# Altium PCB ControleArduinoPCB.PcbDoc
Units mm, origin at the board's own origin, x right, y up, seen from the top; angles counter-clockwise.
Board outline 72.86 x 30.99 mm, 2 copper layers (Top Layer, Bottom Layer); 28 components, 30 nets, 124 pads, 15 vias.
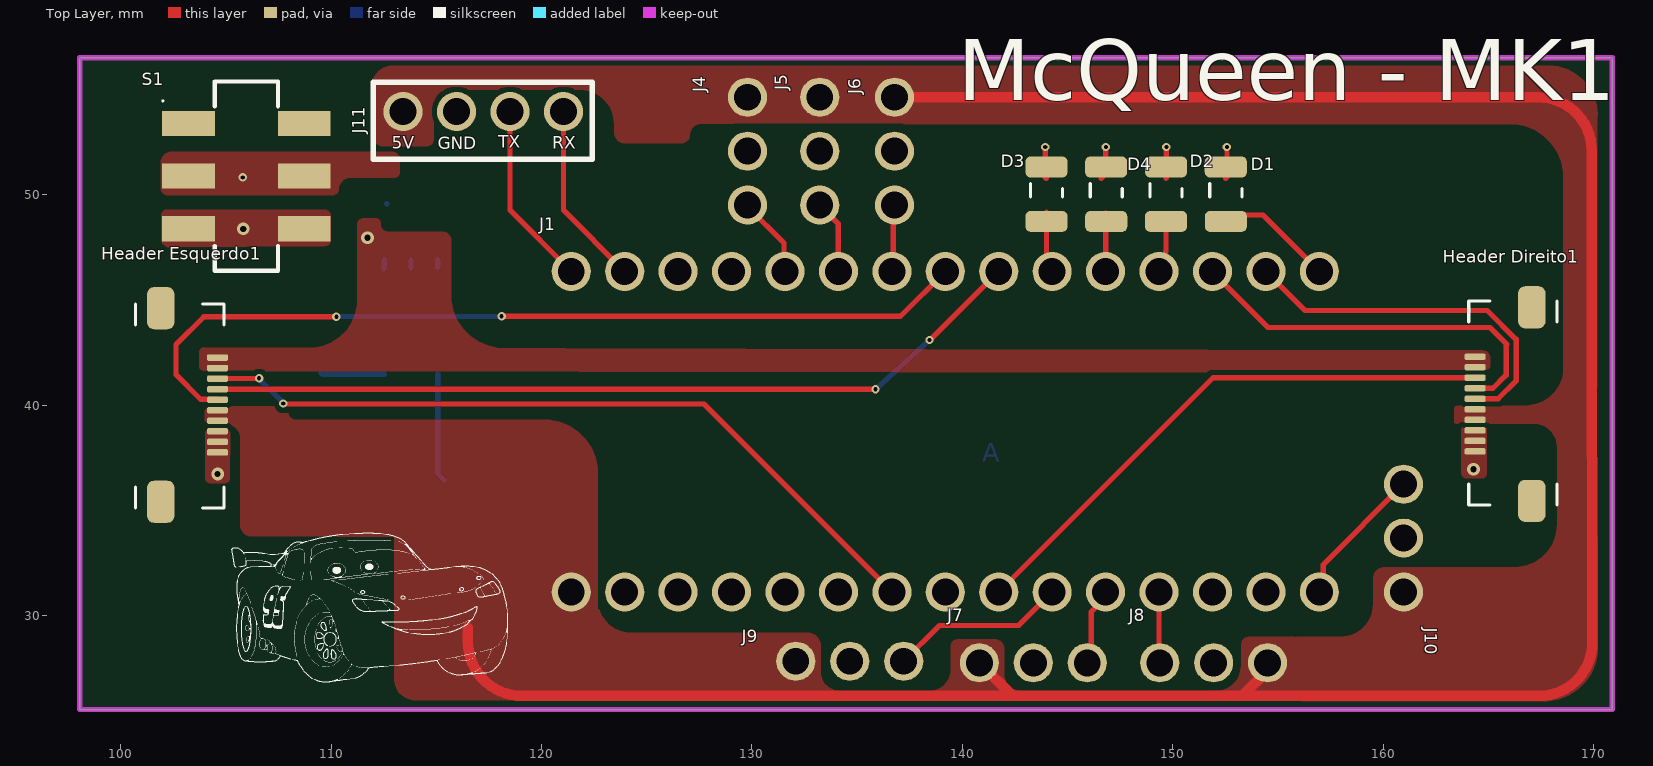
[diagram p0: Top Layer view]
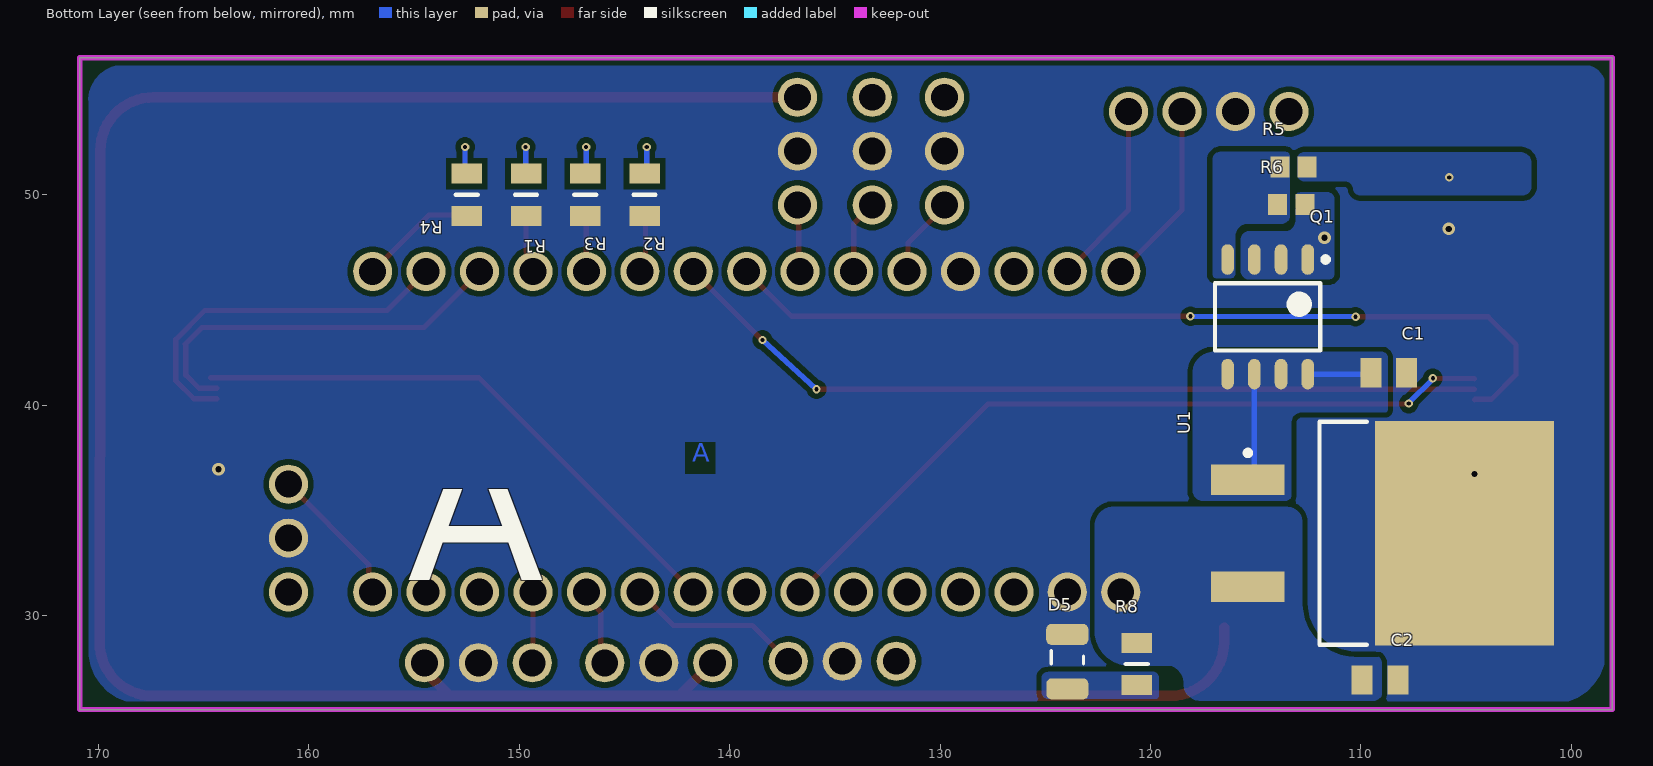
[diagram p1: Bottom Layer view, seen from below]

## Layer stack, top to bottom
Top Solder: solder mask 0.0102, Solder Resist, Dk 3.5
Top Layer: signal copper 0.0356
Dielectric 1: dielectric 0.32, FR-4, Dk 4.8
Bottom Layer: signal copper 0.0356
Bottom Solder: solder mask 0.0102, Solder Resist, Dk 3.5

## Board outline
98.044,25.527 170.9,25.527 170.9,56.515 98.044,56.515

## Design rules (kind name [scope] priority, off if disabled: settings)
Clearance [All] p1: gap=0.254 ignorepadtopadclearanceinfootprint=TRUE except(0: Arc-Hole Track-Hole SMDPad-Hole THPad-Hole Via-Hole Fill-Hole Poly-Hole Region-Hole Text-Hole; 0.1: Arc-Arc Arc-Track Arc-SMDPad Arc-Via Track-Track Track-SMDPad Track-Via SMDPad-SMDPad)
Height [All] p1: minheight=0 maxheight=100 prefheight=12.7
PlaneClearance [All] p1: clearance=0.1
PolygonConnect [All] p1: connectstyle=Direct reliefconductorwidth=0.254 reliefentries=4 polygonreliefangle="90 Angle" airgapwidth=0.254
RoutingVias [All] p1: holewidth=0.711 width=1.27 viastyle="Through Hole" minholewidth=0.711 minwidth=1.27 maxholewidth=0.711 maxwidth=1.27
SolderMaskExpansion [All] p1: expansion=0.102 istentingtop=FALSE
Width [All] p1: maxlimit=1 minlimit=0.254 preferedwidth=0.254 bottomlayer_maxwidth=0.254 minimp=50.000000 maximp=50.000000 favimp=50.000000
28 further rules are at their usual default settings.

## Classes and differential pairs
component class FontesLineares: 3 C1 C2 D5 Q1 R5 R6 R8 S1 U1
component class controleArduino: D1 D2 D3 D4 "Header Direito1" "Header Esquerdo1" J1 J3 J4 J5 J6 J7 J8 J9 J10 J11 R1 R2 R3 R4

## Components (designator, comment, footprint, x,y, rotation, side; value= is the part's Value field where it differs from the comment)
C1 "0.33 uF" C0805 108.673,41.521 r0 bottom
C2 "0.1uF" C0805 109.093,26.924 r0 bottom
D1 "Blue" DIODO_2-SMD-3215 152.527,50.033 r270 top
D2 "Blue" DIODO_2-SMD-3215 149.685,50.033 r270 top
D3 "Blue" DIODO_2-SMD-3215 144,50.033 r270 top
D4 "Blue" DIODO_2-SMD-3215 146.842,50.033 r270 top
D5 "Blue" DIODO_2-SMD-3215 123.952,27.813 r270 bottom
"Header Direito1" "505278-1033" FPC_CON 165.975,40.05 r90 top
"Header Esquerdo1" "505278-1033" FPC_CON 102.997,40.005 r270 top
J1 "ARDUINI NANO HEADER" "ARDUINO NANO" 121.422,31.115 r0 top
J4 "Female Header 3" "FEMALE HEADER 3" 129.794,54.635 r270 top
J5 "Female Header 3" "FEMALE HEADER 3" 133.223,54.635 r270 top
J6 "Female Header 3" "FEMALE HEADER 3" 136.779,54.635 r270 top
J7 "Female Header 3" "FEMALE HEADER 3" 140.81,27.75 r0 top
J8 "Female Header 3" "FEMALE HEADER 3" 154.515,27.75 r180 top
J9 "Female Header 3" "FEMALE HEADER 3" 137.215,27.825 r180 top
J10 "Female Header 3" "FEMALE HEADER 3" 160.975,31.11 r90 top
J11 "Bluetooth" BLUETOOTH 113.42,53.95 r0 top
Q1 "FDS6576" SOIC-8 114.427,44.196 r270 bottom
R1 "1.5 kR" RESISTOR_0805 149.683,50 r270 bottom
R2 "1.5 kR" RESISTOR_0805 144.05,50 r270 bottom
R3 "1.5 kR" RESISTOR_0805 146.867,50 r270 bottom
R4 "1.5 kR" RESISTOR_0805 152.5,50 r270 bottom
R5 "10kR" RESISTOR_0603 113.2,51.325 r0 bottom
R6 "10kR" RESISTOR_0603 113.3,49.525 r0 bottom
R8 "750R" RESISTOR_0805 120.65,27.686 r90 bottom
S1 "JS202011SCQN" DPDT 105.966,50.887 r270 top
U1 "L7805CD2T-TR" D2PAK 108.966,33.909 r180 bottom

## Footprints (in the part's own frame and the unit in brackets; to place one, negate y for a bottom-side part, rotate by r counter-clockwise, add the part's x,y. Pads: shape width x height; smd on the part's side, far side on the other; paste and mask are expansions set on the pad)
"ARDUINO NANO" [mm]
  round 1.86 hole 1.28: 3.3V(33.01,0) 5V(7.61,0) A0(27.93,0) A1(25.39,0) A2(22.85,0) A3(20.31,0) A4(17.77,0) A5(15.23,0) A6(12.69,0) A7(10.15,0) AREF(30.47,0) D0(2.53,15.24) D1(-0.01,15.24) D2(10.15,15.24) D3(12.69,15.24) D4(15.23,15.24) D5(17.77,15.24) D6(20.31,15.24) D7(22.85,15.24) D8(25.39,15.24) D9(27.93,15.24) D10(30.47,15.24) D11(33.01,15.24) D12(35.55,15.24) D13(35.55,0) GND(2.53,0) GND(7.61,15.24) RST(5.07,0) RST(5.07,15.24) Vin(-0.01,0)
  body extent -1.53,-1.25 37.07,16.49, height 5
BLUETOOTH [mm]
  round 1.86 hole 1.28: GND(2.54,0) RX(7.62,0) TX(5.08,0) VCC(0,0)
  silkscreen extent -1.42,-2.26 8.99,1.4, body extent -3.67,-1.26 11.33,5.67, height 46
C0805 [mm]
  rect 1x1.4 smd: 1(-0.85,-0.008) 2(0.85,-0.008)
  body extent -1.07,-0.68 1.07,0.67, height 0.9
D2PAK [mm] "D2-PAK, 3-Pads, Body 7,60x8,64mm (max), IPC Medium Density"
  rect 3.5x1.45 smd: 1(-6.4,2.54) 3(-6.4,-2.54)
  rect 8.5x10.65 smd: 2(3.9,0)
  silkscreen extent -6.53,-5.3 -0.75,5.3, body extent -7.41,-5.28 7.89,5.28, height 4.81
DIODO_2-SMD-3215 [mm]
  rrect50% 1x2 smd: A(1.3,0) C(-1.288,-0.001)
  silkscreen extent -0.51,-0.76 0.13,0.76, body extent -1.61,-0.77 1.66,0.87, height 0.9
DPDT [mm]
  rect 1.2x2.5 smd: A1(0,2.75) A1(0,-2.75) A2(-2.5,2.75) A2(-2.5,-2.75) A3(2.5,2.75) A3(2.5,-2.75)
  silkscreen extent -4.5,-4 4.5,1.5, body extent -4.5,-3.5 4.5,3.5, height 5.65
"FEMALE HEADER 3" [mm]
  round 1.86 hole 1.28: PIN1(0,0) PIN2(2.565,0) PIN3(5.13,0)
  body extent -1.52,-1.27 6.6,1.27, height 8.5
FPC_CON [mm] "Small Outline IC (SOIC), 1.27 mm pitch; 8 pin, 4.90 mm L X 3.90 mm W X 1.75 mm H body"
  rrect50% 0.3x1 smd: 1(-2.25,1.6) 2(-1.75,1.6) 3(-1.25,1.6) 4(-0.75,1.6) 5(-0.25,1.6) 6(0.25,1.6) 7(0.75,1.6) 8(1.25,1.6) 9(1.75,1.6) 10(2.25,1.6)
  rrect50% 2x1.3 smd: MP1(-4.6,-1.1) MP2(4.6,-1.1)
  silkscreen extent -4.8,-2.3 4.9,1.9, body extent -5.25,-3.5 5.25,1.8, height 1.88
RESISTOR_0603 [mm]
  rect 0.9x1 smd: 1(-0.65,0) 2(0.65,0)
  body extent -0.8,-0.4 0.8,0.4, height 0.55
RESISTOR_0805 [mm]
  rect 0.95x1.45 smd: 1(-1,0) 2(1,0)
  silkscreen extent 0,-0.53 0,0.53, body extent -1.02,-0.63 1.02,0.63, height 0.5
SOIC-8 [mm] "SOIC, 8-Leads, Body 4,90x3,90mm, Pitch 1,27mm, IPC Medium Density"
  oval 1.45x0.6 smd: D(2.725,-1.905) D(2.725,-0.635) D(2.725,0.635) D(2.725,1.905) G(-2.725,-1.905) S(-2.725,-0.635) S(-2.725,0.635) S(-2.725,1.905)
  silkscreen extent -2.85,-2.5 1.6,2.88, body extent -2,-2.5 2,2.5, height 1.75

## Part data
C1: library part GCM21BR71E334KA37K, "CAP CER 0.33UF 25V X7R 0805", Manufacturer="Murata Eletronics", Operating Temperature="-55 C ~ 125 C", Package / Case="0805 (2012 Metric)", Supplier Part Number 1=81-GCM21BR71E334KA7K, Tolerance=10%, Voltage - Rated="25 VDC", Category="Ceramic Capacitor", ComponentLink1Description=Datasheet, ComponentLink1URL=https://br.mouser.com/datasheet/2/281/GCM21BR71E334KA37_01-1968656.pdf, ComponentLink2Description="Mouser Link", ComponentLink2URL=https://br.mouser.com/ProductDetail/Murata-Electronics/GCM21BR71E334KA37K?qs=N3Kl9KD794Tg%2FXM5q2uFQQ%3D%3D, ComponentLink3Description=ESR, ComponentLink3URL=https://www.murata.com/en-us/products/productdetail?partno=GCM21BR71E334KA37%23, Dieletric=X7R, Library Control - Checked Footprint=Yes, Library Control - Checked Schematic=Yes, Library Control - Last Update="28/06/2021 00:57", Library Control - Person that Checked Footprint=Nikaum, Library Control - Person that Checked Schematic=Nikaum, Library Control - Person that did the Last Update Footprint=Nikaum, Library Control - Person that did the Last Update Schematic=Nikaum, Library Ref=Capacitor, Part Number=GCM21BR71E334KA37K, Price="1= 0,57, 10= 0,398, 100= 0,239 (USD)", Size / Dimension="2,00 L x 1,25 W x 1,25 H", Supplier 1=Mouser
C2: library part C0805C104M3RACTU, "CAP CER 0.1uF 25V X7R 0805", Manufacturer=Kemet, Operating Temperature="-55 C ~ 125 C", Package / Case="0805(2012 mestric)", Supplier Part Number 1=80-C0805C104M3R, Tolerance=20%, Voltage - Rated="25 VDC", Category="Ceramic Capacitor", ComponentLink1Description=Datasheet, ComponentLink1URL=https://br.mouser.com/datasheet/2/212/KEM_C1002_X7R_SMD-1102033.pdf, ComponentLink2Description="Mouser Link", ComponentLink2URL=https://br.mouser.com/ProductDetail/KEMET/C0805C104M3RACTU?qs=jbCUrP3sAgSIdMuvv9W4Pg%3D%3D, Dieletric=X7R, ESR=-, Library Control - Checked Footprint=No, Library Control - Checked Schematic=Yes, Library Control - Last Update="26/06/2021 20:52", Library Control - Person that Checked Schematic=Guilherme, Library Control - Person that did the Last Update Schematic=Marcos, Library Ref=Capacitor, Part Number=C0805C104M3RACTU, Price="1=0,13 10=0,064 100=0,037 1000=0,025 (USD)", Size / Dimension="1.25 mm W x 2 mm L x 0.78 mm H", Supplier 1=Mouser
D1 D2 D3 D4 D5: library part EAST3215BA5, "LED 75mW BLUE 45MCD 3215", Current - Forward (If)="20 mA", Manufacturer="Everlight Electronics", Max Power Dissipation="75 mW", Operating Temperature="- 40 °C ~ 85 °C", Package / Case=3215, Reverse Voltage="5 V", Supplier Part Number 1=638-EAST3215BA5, Voltage - Forward (Vf)="3,30 V", Category="Standard LEDs - SMD", Color=Blue, ComponentLink1Description="Mouser Link", ComponentLink1URL=https://www.mouser.com/ProductDetail/Everlight/EAST3215BA5?qs=Cqqh%252BS766wnzp9nQVj5A4g==, ComponentLink2Description=Datasheet, ComponentLink2URL=https://www.mouser.com/datasheet/2/143/EAST3215BA5-1154292.pdf, Library Control - Checked Footprint=yes, Library Control - Checked Schematic=yes, Library Control - Last Update="13/06/2021 12:45", Library Control - Person that Checked Footprint=Lucas, Library Control - Person that Checked Schematic=Lucas, Library Control - Person that did the Last Update Footprint="Stéfany (Ster)", Library Control - Person that did the Last Update Schematic="Stéfany (Ster)", Library Ref=Diodo/Led, Luminous Intensity="45 mcd", Max Current Rating="20 mA", Part Number=EAST3215BA5, Price="1 = 0,3800, 10 = 0,2050, 100 = 0.1080 (USD)", Supplier 1=Mouser, Viewing Angle=130°, Wavelength="468 nm"
"Header Direito1" "Header Esquerdo1": library part 505278-1033_BODY, "CONN FFC/FPC HORZ 10POS 0.50MM", Current Rating (Amps)=500mA, Manufacturer=Molex, Operating Temperature="-40°C ~ 85°C", Supplier Part Number 1=538-505278-1033, Category=Connectors, ComponentLink1Description=Datasheet, ComponentLink1URL=https://br.mouser.com/datasheet/2/276/2/5052781033_FFC_FPC_CONNECTORS-772019.pdf, ComponentLink2Description="Mouser Link", ComponentLink2URL=https://br.mouser.com/ProductDetail/Molex/505278-1033?qs=c8NFF48pVsDStgrQCBOSTg%3D%3D, Contact Length - Mating=0.50mm, Contact Material=Tin, Contact Type=FFC/FPC, Insulation Material="Liquid Crystal Polymer", Library Control - Checked Footprint=Yes, Library Control - Checked Schematic=Yes, Library Control - Last Project that Used=Follow-Final, Library Control - Last Update="24/04/2021 00:25", Library Control - Person that Checked Footprint=Lucas, Library Control - Person that Checked Schematic=Lucas, Library Control - Person that did the Last Update Footprint=Mateus(Dimas), Library Control - Person that did the Last Update Schematic=Mateus(Dimas), Library Ref=Connectors, Mounting Type="Right Angle", Number of Positions=10, Number of Rows=1, Part Number=505278-1033, Pitch=0.50mm, Price="1=0,51000, 10=0,42900, 100=0,33400 (USD)", Supplier 1=Mouser, Termination=SMD
J1: library part "Header Arduino Nano"
J11: library part "Barramento Bluetooth", "BARRAMENTO BLUETOOTH HC-06", Frequency="2,4 GHz", Operating Voltage="3,6 / 6 (V)", Recomended Operating Configuration="5V @ 50mA", Bluetooth Mode="Slave Only", Library Ref=Header, Max Range=10m, Maximum Serial Transmission Rate="9600 bps", Modulation="GFSK (Gaussian Frequency Shift Keying)", Number of Contacts=4
Q1: "MOSFET P-CH 20V 11A SOIC-8", Current - Continuous Drain (Id) @25°C=-11A, Drain to Source Voltage (Vds)=-20V, Drive Voltage (Max Rds On, Min Rds On)="-2.5V ~4.5V", Input Capacitance (Ciss) (Max) @Vds=4044pF@-10V, Manufacturer="onsemi / Fairchild", Operating Temperature="-55 °C ~150 °C", Package / Case=SOIC-8, Power Dissipation (Max)=2.5W, Supplier Part Number 1=512-FDS6576, ComponentLink1Description=Datasheet, ComponentLink1URL=https://br.mouser.com/datasheet/2/308/1/FDS6576_D-1808687.pdf, ComponentLink2Description=Mouser, ComponentLink2URL=https://br.mouser.com/ProductDetail/onsemi-Fairchild/FDS6576?qs=FOlmdCx%252BAA1N14vq5QZP7Q%3D%3D, FET Type=P-Channel, Gate Charge (Qg) (Max) @ Vgs=60nC@-4.5V, Library Ref=Mosfet, Part Number=SOIC-8, Price="1=1.34, 10=1.20, 100=0.932, 500=0.77, 1000=0.608 (USD)", Rds On (Max) @ Id, Vgs="23mOhms @ -11A, -4.5V", Rise / Fall Time (Typ)="17 / 79 (ns)", Supplier 1=Mouser, Vgs (Max)=12V, Vgs(th) (Max) Id=-1.5V@-250uA
R1 R2 R3 R4: library part CRCW08051K50FKEAC, "RES SMD 1.5K OHM 1% 1/8W 0805", Manufacturer="Vishay / Dale", Operating Temperature="-55 C ~ 155 C", Package / Case="0805 (2012 Metric)", Power Rating="125 mW (1/8 W)", Resistor Type=Fixo, Supplier Part Number 1=71-CRCW08051K50FKEAC, Temperature Coefficient="100 PPM / C", Tolerance="1 %", Voltage Rating="150 V", Category="Thick Film Resistors - SMD", ComponentLink1Description="Mouser Link", ComponentLink1URL=https://br.mouser.com/ProductDetail/Vishay-Dale/CRCW08051K50FKEAC?qs=E3Y5ESvWgWMwo6R2oqPQ9Q%3D%3D, ComponentLink2Description=Datasheet, ComponentLink2URL=https://br.mouser.com/datasheet/2/427/crcwce3-1762584.pdf, Library Control - Checked Footprint=Yes, Library Control - Checked Schematic=Yes, Library Control - Last Update="27/06/2021 20:45", Library Control - Person that Checked Footprint=Nikaum, Library Control - Person that Checked Schematic=Nikaum, Library Control - Person that did the Last Update Footprint=Nicolas, Library Control - Person that did the Last Update Schematic=Nikaum, Library Ref=Resistor, Part Number=CRCW08051K50FKEAC, Price="1=0,10, 10=0,059, 100=0,024 (USD)", Size / Dimension="2,00 L x 1,25 W x 0,45 H", Supplier 1=Mouser
R5 R6: library part RC0603JR-0710KL, "RES SMD 10K OHM 5% 1/10W 0603", Manufacturer=Yageo, Operating Temperature="- 55ºC ~ 155ºC", Package / Case="0603 (1608 Metric)", Power Rating="100 mW (1/10 W)", Resistor Type=Fixo, Supplier Part Number 1=603-RC0603JR-0710KL, Temperature Coefficient="100 PPM / C", Tolerance="5 %", Voltage Rating="75 V", Category="Thick Film Resistors - SMD", ComponentLink1Description="Mouser Link", ComponentLink1URL=https://br.mouser.com/ProductDetail/Yageo/RC0603JR-0710KL?qs=ksOUTF%2FWcd8D6T22BJkQ7g%3D%3D, ComponentLink2Description="Datsheet Link", ComponentLink2URL=https://br.mouser.com/datasheet/2/447/Yageo_03_18_2021_PYu_RC_Group_51_RoHS_L_11-2199992.pdf, Library Control - Checked Footprint=No, Library Control - Checked Schematic=Yes, Library Control - Last Update="21/06/21 14:15", Library Control - Person that Checked Schematic=Marcos, Library Control - Person that did the Last Update Footprint=Dalarme, Library Control - Person that did the Last Update Schematic=Marcos, Library Ref=Resistor, Part Number=RC0603JR-0710KL, Price="1=0,10, 10=0,015, 100=0,005 1000=0,0040 (USD)", Size / Dimension="1.6 mm L x  0.8 mm W x  0.45 mm H", Supplier 1=Mouser
R8: library part ERJ-6GEYJ751V, "RES SMD 750 OHM 5% 1/8W 0805", Manufacturer=Panasonic, Operating Temperature="- 55ºC ~ 155ºC", Package / Case="0805 (2012 Metric)", Power Rating="125 mW (1/8 W)", Resistor Type=Fixed, Supplier Part Number 1=667-ERJ-6GEYJ751V, Temperature Coefficient="200 PPM / C", Tolerance="5 %", Voltage Rating="150 V", Category="Thick Film Resistors - SMD", ComponentLink1Description="Mouser Link", ComponentLink1URL=https://br.mouser.com/ProductDetail/Panasonic/ERJ-6GEYJ751V?qs=sGAEpiMZZMukHu%252BjC5l7YYjpZ9X9PhOCxoCk8Svj5Vk%3D, ComponentLink2Description=Datasheet, ComponentLink2URL=https://br.mouser.com/datasheet/2/315/AOA0000C301-1488782.pdf, Library Control - Checked Footprint=Yes, Library Control - Checked Schematic=Yes, Library Control - Last Update="27/06/2021 20:29", Library Control - Person that Checked Footprint=Nikaum, Library Control - Person that Checked Schematic=Guilherme, Library Control - Person that did the Last Update Footprint=Dalarme, Library Control - Person that did the Last Update Schematic=Nikaum, Library Ref=Resistor, Part Number=ERJ-6GEYJ751V, Price="1=0,10, 10=0,055, 100=0,021 (USD)", Size / Dimension="2 mm L x  1.25 mm W x  0.6 mm H", Supplier 1=Mouser
S1: "DEEP SWITCH 4 POSITIONS", Current Rating="300 mA", Manufacturer=C&K, Mouser Part Number=611-JS202011SCQN, Operating Temperature(max - min)=-20~70°C, Voltage Rating DC="30 VDC", ComponentLink1Description="Mouser Link", ComponentLink1URL=https://br.mouser.com/ProductDetail/CK/JS202011SCQN?qs=LgMIjt8LuD95JYWxZ7NvZA%3D%3D, ComponentLink2Description="Datasheet Link", ComponentLink2URL=https://www.mouser.com/datasheet/2/60/js-1841892.pdf, Library Control - Checked Footprint=Yes, Library Control - Checked Schematic=Yes, Library Control - Last Update=15/06/2021, Library Control - Person that Checked Footprint=Nikaum, Library Control - Person that Checked Schematic=Nikaum, Library Control - Person that did the Last Update Footprint=Nikaum, Library Control - Person that did the Last Update Schematic=Nikaum, Library Ref=Diversos, Part Number=JS202011SCQN, Supplier=Mouser, Switch Function="ON - ON"
U1: "IC REG LINEAR 5V 1A D2PAK", Current - Output=1A, Current - Quiescent (Iq)=8mA, Manufacturer=ST, Max Power Dissipation="Internally Limited", Operating Temperature="-40~125 ºC", Package/ Case=D2PAK, Supplier Part Number 1=511-L7805CD2T-TR, Voltage - Dropout (Max)=2V, Voltage - Input (Max)=35V, Voltage - Output (Max)=5.25V, Voltage - Output (Min/Fixed)=5V, Category="Linear Voltage Regulator", ComponentLink1Description="Mouser Link", ComponentLink1URL=https://br.mouser.com/ProductDetail/STMicroelectronics/L7805CD2T-TR?qs=%2Fha2pyFadujE9KQ1BxQHaLKqcK8XYkwQA8UfL%2FIGb8dfQq%2Fq%2FT%2Fjqg%3D%3D, ComponentLink2Description=Datasheet, ComponentLink2URL=https://br.mouser.com/datasheet/2/389/cd00000444-1795274.pdf, Library Control - Checked Footprint=Yes, Library Control - Checked Schematic=Yes, Library Control - Last Update=25/06/21, Library Control - Person that Checked Footprint=Nícolas, Library Control - Person that Checked Schematic=Nícolas, Library Control - Person that did the Last Update Schematic=Nícolas, Library Ref="Voltage Regulator", Number of Regulators=1, Output Type=Fixed, Part Number=L7805CD2T-TR, Power Dissipation="Internally Limited", Price="1=0,93, 10=0,83, 100=0,79 (USD)", Supplier 1=Mouser
J4 J5 J6 J7 J8 J9 J10: Library Ref=Header, Number of Contacts=3, System=Connector

## Via types
v1: diameter 0.4, hole 0.2, Top Layer to Bottom Layer, tented top, 11 vias
v2: diameter 0.6, hole 0.3, Top Layer to Bottom Layer, tented top, 4 vias

## Nets (pads, with @x,y where several pads share a name; then routed paths per layer and width w, separated by ;. In a path a pad name is that pad's centre, name@x,y a point inside that pad or via, vN(x,y) a via of type N, cw(c..) or ccw(c..) an arc to the next point about the centre after c; other vN are vias at no path point)
5V: "Header Direito1.4" "Header Direito1.5" "Header Esquerdo1.6" "Header Esquerdo1.7" C2.2 J1.Vin J4.PIN1 J5.PIN1 J6.PIN1 J7.PIN1 J8.PIN1 J9.PIN3 J10.PIN1 J11.VCC R8.2 U1.3 | length 119.3
  Top Layer w0.5: 116.5,29.421 116.5,28.75 ccw(c119.075,28.75) 119.075,26.175 142.385,26.175 ; J6.PIN1 167.379,54.635 cw(c167.379,52.095) 169.919,52.095 169.919,37.62 cw(c167.375,37.225) 169.95,37.225 169.95,28.715 cw(c167.41,28.715) 167.41,26.175 153.308,26.175 ; J7.PIN1 142.385,26.175 ; J8.PIN1 154.515,27.382 153.308,26.175 ; 142.385,26.175 153.308,26.175
BAT: "Header Direito1.9" "Header Direito1.10" "Header Esquerdo1.1" "Header Esquerdo1.2" Q1.S R6.1 | length 1.2
  Bottom Layer w0.254: Q1.S@112.522,46.489 Q1.S@112.522,46.921 ; R6.1@112.632,49.582 R6.1@112.647,49.567 ; Q1.S@113.792,46.496 Q1.S@113.792,46.921 ; Q1.S@115.062,46.553 Q1.S@115.062,46.921
  other v2: 111.725,47.95
BLUETOOTHRX: J1.D0 J11.RX | length 8.8
  Top Layer w0.254: J11.RX 121.04,49.267 J1.D0
BLUETOOTHTX: J1.D1 J11.TX | length 8.8
  Top Layer w0.254: J11.TX 118.5,49.267 J1.D1
DIST1: J1.D2 J4.PIN3 | length 4.5
  Top Layer w0.254: J4.PIN3 129.794,49.429 131.525,47.698 J1.D2@131.525,45.717
DIST2: J1.D3 J5.PIN3 | length 3.5
  Top Layer w0.254: J5.PIN3 134.1,48.628 J1.D3@134.1,46.395
DIST3: J1.D4 J6.PIN3 | length 3.2
  Top Layer w0.254: J1.D4 136.715,46.419 136.715,49.442 J6.PIN3
DIST4: J1.A1 J7.PIN3 | length 3.7
  Top Layer w0.254: J7.PIN3 146.127,27.937 146.127,30.163 146.812,30.848 J1.A1
DIST5: J1.A0 J8.PIN3 | length 4.2
  Top Layer w0.254: J8.PIN3@149.095,27.562 149.352,27.305 J1.A0
FLAGSIGNAL: J1.A2 J9.PIN1 | length 8.4
  Top Layer w0.254: J9.PIN1 138.915,29.525 142.682,29.525 J1.A2
GND: "Header Direito1.1" "Header Direito1.2" "Header Direito1.3" "Header Esquerdo1.8" "Header Esquerdo1.9" "Header Esquerdo1.10" C1.1 C2.1 D5.C J1.GND J4.PIN2 J5.PIN2 J6.PIN2 J7.PIN2 J8.PIN2 J9.PIN2 J10.PIN2 J11.GND R1.2 R2.2 R3.2 R4.2 S1.A3 U1.2
  other v2: 104.6,36.725 164.3,36.95 105.825,48.375
LED1: D1.A J1.D12 | length 5.6
  Top Layer w0.254: D1.A@152.527,49.035 154.292,49.035 J1.D12
LED2: D2.A J1.D9 | length 2.8
  Top Layer w0.254: J1.D9 149.659,46.662 149.659,47.281 149.685,47.307 D2.A@149.685,49.03
LED3: D3.A J1.D7 | length 2.9
  Top Layer w0.254: D3.A@144,49.172 144,46.627 J1.D7
LED4: D4.A J1.D8 | length 2.8
  Top Layer w0.254: J1.D8 146.812,48.147 D4.A@146.812,49.134
M1Aux: "Header Direito1.8" J1.A3 | length 27.2
  Top Layer w0.254: J1.A3 151.917,41.3 164.674,41.3
M1DIR: "Header Esquerdo1.5" J1.D5 | length 41.9
  Top Layer w0.254: 104.597,40.255 104.574,40.278 103.797,40.278 102.625,41.45 102.625,42.875 103.95,44.2 v1(110.25,44.2) ; v1(118.1,44.225) 137.062,44.225 J1.D5
  Bottom Layer w0.254: v1(110.25,44.2) 110.262,44.212 118.088,44.212 v1(118.1,44.225)
M1PWM: "Header Esquerdo1.4" J1.D6 | length 39.4
  Top Layer w0.254: 104.597,40.755 104.599,40.753 135.872,40.753 v1(135.875,40.75) ; v1(138.443,43.094) 138.457,43.094 141.718,46.355 J1.D6
  Bottom Layer w0.254: v1(135.875,40.75) 135.906,40.778 v1(138.443,43.094)
M2Aux: "Header Esquerdo1.3" J1.A5 | length 36.3
  Top Layer w0.254: 104.597,41.255 104.607,41.265 106.565,41.265 v1(106.575,41.275) ; v1(107.725,40.075) 107.75,40.05 127.717,40.05 J1.A5
  Bottom Layer w0.254: v1(106.575,41.275) 106.575,41.25 107.725,40.1 v1(107.725,40.075)
M2DIR: "Header Direito1.6" J1.D11 | length 18.4
  Top Layer w0.254: J1.D11@153.924,45.847 154.493,45.847 J1.D11@154.727,45.613 ; J1.D11 156.29,44.497 164.953,44.497 166.325,43.125 166.325,41.15 165.475,40.3 164.375,40.3
M2PWM: "Header Direito1.7" J1.D10 | length 18.7
  Top Layer w0.254: J1.D10 151.892,46.324 154.528,43.688 165.087,43.688 165.875,42.9 165.85,42.875 165.85,41.425 165.225,40.8 164.375,40.8
NetC1_2: C1.2 Q1.D U1.1 | length 8.2
  Bottom Layer w0.254: C1.2 109.581,41.471 Q1.D@112.522,41.471 ; Q1.D@115.062,41.471 115.062,36.753 U1.1
NetD1_C: D1.C R4.1 | length 2.8
  Top Layer w0.254: 152.527,50.783 152.581,50.837 v1@152.581,52.259
  Bottom Layer w0.254: R4.1 ccw(c152.5,51.081) 152.581,51.081 v1(152.581,52.27)
NetD2_C: D2.C R1.1 | length 2.8
  Top Layer w0.254: 149.685,50.783 149.703,50.801 v1(149.703,52.27)
  Bottom Layer w0.254: R1.1 149.703,51.02 v1(149.703,52.27)
NetD3_C: D3.C R2.1 | length 2.8
  Top Layer w0.254: v1(143.948,52.27) 143.948,50.835 ccw(c144,50.835) 144,50.783
  Bottom Layer w0.254: v1(143.948,52.27) 143.948,51.102 R2.1
NetD4_C: D4.C R3.1 | length 2.8
  Top Layer w0.254: 146.6,50.775 146.825,51 v1@146.825,52.225
  Bottom Layer w0.254: v1(146.826,52.27) 146.826,51.041 R3.1
NetD5_A: D5.A R8.1
NetQ1_G: Q1.G R5.2 R6.2
NetR5_1: R5.1 S1.A1
  other v1: 105.8,50.825
START: J1.D13 J10.PIN3 | length 6.8
  Top Layer w0.254: J1.D13 157.161,31.304 157.161,32.426 J10.PIN3
pads on no net: "Header Direito1.MP1" "Header Direito1.MP2" "Header Esquerdo1.MP1" "Header Esquerdo1.MP2" J1.3.3V J1.5V J1.A4 J1.A6 J1.A7 J1.AREF J1.RST S1.A2

## Polygon pours and split planes (outlines as drawn)
5V on Top Layer "5V_L01_P075" (solid, pour order 75): 106.16,39.95 107.675,39.95 cw(c107.675,39.675) 107.95,39.675 ccw(c108.325,39.675) 108.325,39.3 108.825,39.3 cw(c108.1,39.3) 108.1,38.575 106.525,38.575 cw(c106.525,39.225) 105.875,39.225
BAT on Top Layer "BAT_L01_P030" (solid, pour order 30): 103.975,42.75 ccw(c103.975,42.5) 103.725,42.5 103.725,41.825 ccw(c103.95,41.85) 103.975,41.625 164.722,41.525 ccw(c164.747,41.865) 165.087,41.841 165.087,42.262 ccw(c164.75,42.263) 164.75,42.6
5V on Top Layer "5V_L01_P077" (solid, pour order 77): 122.65,30.8 ccw(c124.275,30.8) 124.275,29.175 130.895,29.175 130.895,27.32 cw(c129.725,27.32) 129.725,26.15 123.85,26.15 cw(c123.85,27.625) 122.375,27.625
5V on Top Layer "5V_L01_P076" (solid, pour order 76): 111.9,52.9 ccw(c112.5,52.9) 112.5,52.3 114.525,52.3 ccw(c114.525,52.65) 114.875,52.65 114.875,54.275 cw(c115.6,54.275) 115.6,55 121.8,55 cw(c121.8,53.35) 123.45,53.35 ccw(c123.45,55.05) 125.15,55.05 125.15,56.15 112.975,56.15 ccw(c112.975,55.075) 111.9,55.075
5V on Top Layer "5V_L01_P074" (solid, pour order 74): 163.525,39.975 ccw(c163.525,39.825) 163.375,39.825 163.375,39.225 ccw(c163.475,39.225) 163.475,39.125 167.15,39.125 cw(c167.15,38) 168.275,38 168.275,34.325 cw(c166.25,34.325) 166.25,32.3 ccw(c167.455,32.3) 167.455,31.095 170.2,31.095 cw(c170.2,31.145) 170.15,31.145 170.15,41.775 ccw(c170.1,41.775) 170.1,41.825 168.6,41.825 cw(c166.75,41.825) 166.75,39.975 165.575,39.975
GND on Top Layer "GND_L01_P073" (solid, pour order 73): 164.85,38.975 cw(c164.85,38.9) 164.925,38.9 164.925,36.75 cw(c164.725,36.725) 164.75,36.525 163.95,36.525 cw(c163.95,36.75) 163.725,36.75 163.725,38.85 cw(c163.85,38.85) 163.85,38.975
5V on Top Layer "5V_L01_P071" (solid, pour order 71): 104.125,39.1 cw(c104.125,39.225) 104,39.225 104,39.8 cw(c104.15,39.8) 104.15,39.95 106.1,39.95 cw(c106.1,39.65) 106.4,39.65 ccw(c106.75,39.65) 106.75,39.3 120.135,39.3 cw(c120.135,36.76) 122.675,36.76 122.675,33.756 cw(c122.594,33.756) 122.594,33.675 106.187,33.763 cw(c106.187,34.262) 105.687,34.263 105.687,38.412 ccw(c104.988,38.4) 104.975,39.1
GND on Top Layer "GND_L01_P068" (solid, pour order 68): 104.025,38.575 104.025,38.8 cw(c104.2,38.8) 104.2,38.975 104.975,38.975 cw(c104.95,38.725) 105.2,38.7 105.175,36.5 cw(c104.925,36.525) 104.9,36.275 104.25,36.275 cw(c104.25,36.5) 104.025,36.5
NetR5_1 on Top Layer "NETR5_1_L01_P065" (solid, pour order 65): 110.35,50.25 cw(c110.9,50.25) 110.9,50.8 113,50.8 ccw(c113,51.05) 113.25,51.05 113.25,51.675 ccw(c112.875,51.675) 112.875,52.05 102.435,52.05 ccw(c102.435,51.515) 101.9,51.515 ccw(c102.815,51.515) 102.815,50.6 103,50.6
BAT on Top Layer "BAT_L01_P064" (solid, pour order 64): 111.25,47.8 111.25,48.6 cw(c111.525,48.6) 111.525,48.875 112.15,48.875 cw(c112.15,48.675) 112.35,48.675 112.35,48.6 ccw(c112.7,48.6) 112.7,48.25 ccw(c112.7,48.2) 112.65,48.2 112.65,47.525
BAT on Top Layer "BAT_L01_P063" (solid, pour order 63): 108.95,42.725 ccw(c108.95,45.025) 111.25,45.025 111.25,47.8 cw(c111.7,47.8) 111.7,48.25 115.3,48.25 cw(c115.3,47.85) 115.7,47.85 115.7,45.24 ccw(c118.24,45.24) 118.24,42.7 118.625,42.7 118.625,42.3 cw(c118.25,42.3) 118.25,41.925 109.05,41.925 cw(c109.05,42.15) 108.825,42.15
5V on Top Layer "5V_L01_P062" (solid, pour order 62): 137.262,53.361 166.035,53.361 cw(c166.035,50.821) 168.575,50.821 168.575,41.475 cw(c167.15,41.475) 167.15,40.05 167.15,39.65 169.075,39.65 ccw(c168.937,40.887) 170.175,41.025 170.175,53.6 ccw(c167.878,53.83) 168.108,56.127 137.313,56.127
GND on Top Layer "GND_L01_P058" (solid, pour order 58): 101.925,49.05 cw(c102.15,49.05) 102.15,49.275 109.725,49.275 cw(c109.725,49.025) 109.975,49.025 109.975,47.825 cw(c109.7,47.825) 109.7,47.55 102.287,47.512 cw(c102.287,47.875) 101.925,47.875
NetR5_1 on Top Layer "NETR5_1_L01_P057" (solid, pour order 57): 101.9,51.45 cw(c102.225,51.45) 102.225,51.775 110.075,51.775 cw(c110.075,51.5) 110.35,51.5 110.35,50.25 cw(c110.075,50.25) 110.075,49.975 102.225,49.975 cw(c102.225,50.3) 101.9,50.3
5V on Top Layer "5V_L01_P054" (solid, pour order 54): 155.805,29 158,29 ccw(c158,30.525) 159.525,30.525 159.525,31.725 cw(c160.1,31.725) 160.1,32.3 168.25,32.3 ccw(c168.25,33.725) 169.675,33.725 170.2,33.725 170.2,28.465 cw(c167.66,28.465) 167.66,25.925 156.175,25.925 cw(c156.175,26.25) 155.85,26.25
5V on Top Layer "5V_L01_P050" (solid, pour order 50): 125.8,26.4 cw(c125.525,29.25) 122.675,28.975 122.675,33.65 ccw(c121.6,33.65) 121.6,34.725 113.675,34.725 ccw(c113.675,34.05) 113,34.05 113,26.975 ccw(c114,26.975) 114,25.975 125.375,25.975 ccw(c125.375,26.4)
5V on Top Layer "5V_L01_P053" (solid, pour order 53): 134.15,26.425 cw(c134.15,27.3) 133.275,27.3 133.275,28.55 ccw(c132.65,28.55) 132.65,29.175 130.975,29.175 ccw(c130.975,28.775) 130.575,28.775 130.575,27.875 cw(c129.125,27.875) 129.125,26.425 ccw(c129.4,26.425) 129.4,26.15 129.725,26.15 ccw(c129.775,26.15) 129.775,26.1 134.2,26.1
5V on Top Layer "5V_L01_P047" (solid, pour order 47): 142.75,26.425 cw(c142.75,27.175) 142,27.175 142,28.4 ccw(c141.525,28.4) 141.525,28.875 139.8,28.875 ccw(c139.8,28.525) 139.45,28.525 139.45,27.425 cw(c138.45,27.425) 138.45,26.425 ccw(c138.7,26.425) 138.7,26.175 142.75,26.175
5V on Top Layer "5V_L01_P046" (solid, pour order 46): 129.127,56.127 123.877,56.127 ccw(c123.877,55.7) 123.45,55.7 123.45,52.975 ccw(c123.975,52.975) 123.975,52.45 126.65,52.45 ccw(c126.65,52.85) 127.05,52.85 cw(c127.57,52.85) 127.57,53.37 129.01,53.37 ccw(c129.01,53.785) 129.425,53.785 129.425,54.05
5V on Top Layer "5V_L01_P045" (solid, pour order 45): 138.049,55.361 ccw(c138.534,55.36) 138.534,54.875 138.9,54.875 138.9,54.475 cw(c138.825,54.475) 138.825,54.4 138.572,54.4 ccw(c138.572,53.877) 138.049,53.877
5V on Top Layer "5V_L01_P044" (solid, pour order 44): 166.95,40.05 167.35,40.05 ccw(c167.35,42.35) 169.65,42.35 170.1,42.35 cw(c170.1,42.3) 170.15,42.3 170.15,39.125 cw(c169.775,39.125) 169.775,38.75 169.55,38.75 cw(c169.55,39.25) 169.05,39.25 ccw(c168.625,39.25) 168.625,39.675 167.9,39.675
5V on Top Layer "5V_L01_P043" (solid, pour order 43): 151.85,26.425 152.075,26.425 ccw(c152.075,27.6) 153.25,27.6 153.25,28.575 cw(c153.675,28.575) 153.675,29 155.75,29 cw(c155.75,28.725) 156.025,28.725 156.025,27.525 ccw(c157.125,27.525) 157.125,26.425 cw(c156.8,26.425) 156.8,26.1 152,26.1 cw(c152,26.25) 151.85,26.25
5V on Top Layer "5V_L01_P000" (solid, pour order 0): 129.125,53.375 137.191,53.375 ccw(c137.333,54.091) 138.049,53.949 138.049,55.276 ccw(c137.191,55.276) 137.191,56.134 129.234,56.134 ccw(c129.234,55.424) 128.524,55.424 128.524,53.926 ccw(c129.1,53.951)
GND on Bottom Layer "GND_L02_P067" (solid, pour order 67): 112.85,56.175 99.425,56.175 ccw(c99.425,55.1) 98.35,55.1 98.35,28.34 ccw(c100.89,28.34) 100.89,25.8 167.935,25.8 ccw(c167.935,28.34) 170.475,28.34 170.475,54.4 ccw(c168.787,54.487) 168.875,56.175
NetR5_1 on Bottom Layer "NETR5_1_L02_P066" (solid, pour order 66): 113,51.725 ccw(c112.7,51.725) 112.7,52.025 102.43,52.025 ccw(c102.43,51.495) 101.9,51.495 ccw(c103.159,51.495) 103.159,50.235 110.35,50.235 cw(c110.765,50.235) 110.765,50.65 112.7,50.65 ccw(c112.725,50.925) 113,50.9 113,51.1
BAT on Bottom Layer "BAT_L02_P061" (solid, pour order 61): 113.625,48.25 cw(c113.625,48.775) 113.1,48.775 113.1,49.9 ccw(c112.875,49.9) 112.875,50.125 111.6,50.125 ccw(c111.6,49.777) 111.252,49.777 111.252,48.053 cw(c111.251,48.053) 111.252,48.052 ccw(c111.88,48.053) 111.88,47.425 112.375,47.425
NetR5_1 on Bottom Layer "NETR5_1_L02_P059" (solid, pour order 59): 101.9,51.425 cw(c102.25,51.425) 102.25,51.775 109.95,51.775 cw(c109.95,51.375) 110.35,51.375 110.35,50.3 cw(c110.025,50.3) 110.025,49.975 102.3,49.975 cw(c102.3,50.375) 101.9,50.375
NetQ1_G on Bottom Layer "NETQ1_G_L02_P056" (solid, pour order 56): 113.375,51.8 cw(c113.625,51.8) 113.625,52.05 116.625,52.05 cw(c116.625,51.625) 117.05,51.625 117.05,46.225 cw(c116.85,46.225) 116.85,46.025 116.2,46.025 cw(c116.2,46.25) 115.975,46.25 115.975,48 ccw(c115.35,48) 115.35,48.625 113.75,48.625 cw(c113.75,49) 113.375,49
5V on Bottom Layer "5V_L02_P049" (solid, pour order 49): 110.025,28.025 110.236,28.025 ccw(c110.236,30.565) 112.776,30.565 112.776,31.496 113.279,31.496 cw(c113.279,30.3) 114.475,30.3 114.475,29.7 cw(c111.975,29.7) 111.975,27.2
5V on Bottom Layer "5V_L02_P048" (solid, pour order 48): 119.5,27.625 119.2,27.625 ccw(c119.25,26.8) 118.425,26.75 cw(c117.625,26.75) 117.625,25.95 114.959,25.95 cw(c114.959,26.034) 114.875,26.034 114.875,27.75 cw(c115.525,27.75) 115.525,28.4 118.25,28.4
5V on Bottom Layer "5V_L02_P027" (solid, pour order 27): 109.265,28.025 cw(c109.213,28.225) 109.152,28.027 ccw(c109.625,27.581) 108.975,27.559 108.975,26.375 ccw(c109.4,26.375) 109.4,25.95 114.892,25.95 ccw(c114.892,26.633) 115.375,26.15 ccw(c114.832,26.693) 115.6,26.693 115.6,27.8 ccw(c115.352,27.801) 115.351,28.049
NetC1_2 on Bottom Layer "NETC1_2_L02_P025" (solid, pour order 25): 109,42.525 ccw(c109,42.25) 108.725,42.25 108.725,39.775 ccw(c108.85,39.775) 108.85,39.65 112.85,39.65 cw(c112.85,39.2) 113.3,39.2 113.3,35.725 ccw(c113.575,35.725) 113.575,35.45 117.5,35.45 ccw(c117.5,35.95) 118,35.95 118,41.5 ccw(c116.975,41.5) 116.975,42.525
NetD5_A on Bottom Layer "NETD5_A_L02_P011" (solid, pour order 11): 120.243,27.316 119.862,27.316 ccw(c119.862,27.062) 119.608,27.062 119.608,26.173 ccw(c119.735,26.173) 119.735,26.046 124.871,26.046 ccw(c124.871,26.352) 125.177,26.352 125.177,27.045 ccw(c124.883,27.022) 124.86,27.316
BAT on Bottom Layer "BAT_L02_P008" (solid, pour order 8): 115.697,47.878 115.697,46.372 cw(c115.299,46.372) 115.299,45.974 111.526,45.974 cw(c111.526,46.248) 111.252,46.248 111.252,48.002 cw(c111.51,48.002) 111.51,48.26 115.315,48.26 cw(c115.315,47.878)
5V on Bottom Layer "5V_L02_P003" (solid, pour order 3): 112.776,34.417 112.776,28.575 ccw(c113.959,28.802) 114.186,27.619 121.006,27.619 ccw(c121.006,29.25) 122.636,29.25 122.636,34.289 ccw(c121.746,34.289) 121.746,35.179 113.538,35.179 ccw(c113.538,34.417)

## Keep-outs
Keep-Out Layer:
  the board outline again, w0.254

## Other copper
Bottom Layer:
  text "A" at 140.95,37 h1.52

## Silkscreen, mask and mechanical layers (free items; w line width, h text height)
Top Overlay:
  drawing of 19 lines, arcs and shapes, not listed
  text "McQueen - MK1" at 139.791,53.53 h5
Bottom Overlay:
  text "A" at 155.325,26.375 h28
BoardOutLine:
  the board outline again, w0.254

## Text inside footprints (layer, text, board x,y; h text height)
J11: Top Overlay "GND" at 115.071,51.978 h1; Top Overlay "TX" at 117.941,52.04 h1; Top Overlay "RX" at 120.507,51.989 h1; Top Overlay "5V" at 112.887,51.989 h1